# Altium PCB FFD.PcbDoc
Units mm, origin at the board's own origin, x right, y up, seen from the top; angles counter-clockwise.
Board outline 50 x 50 mm, 2 copper layers (Top Layer, Bottom Layer); 7 components, 11 nets, 38 pads, 6 vias.
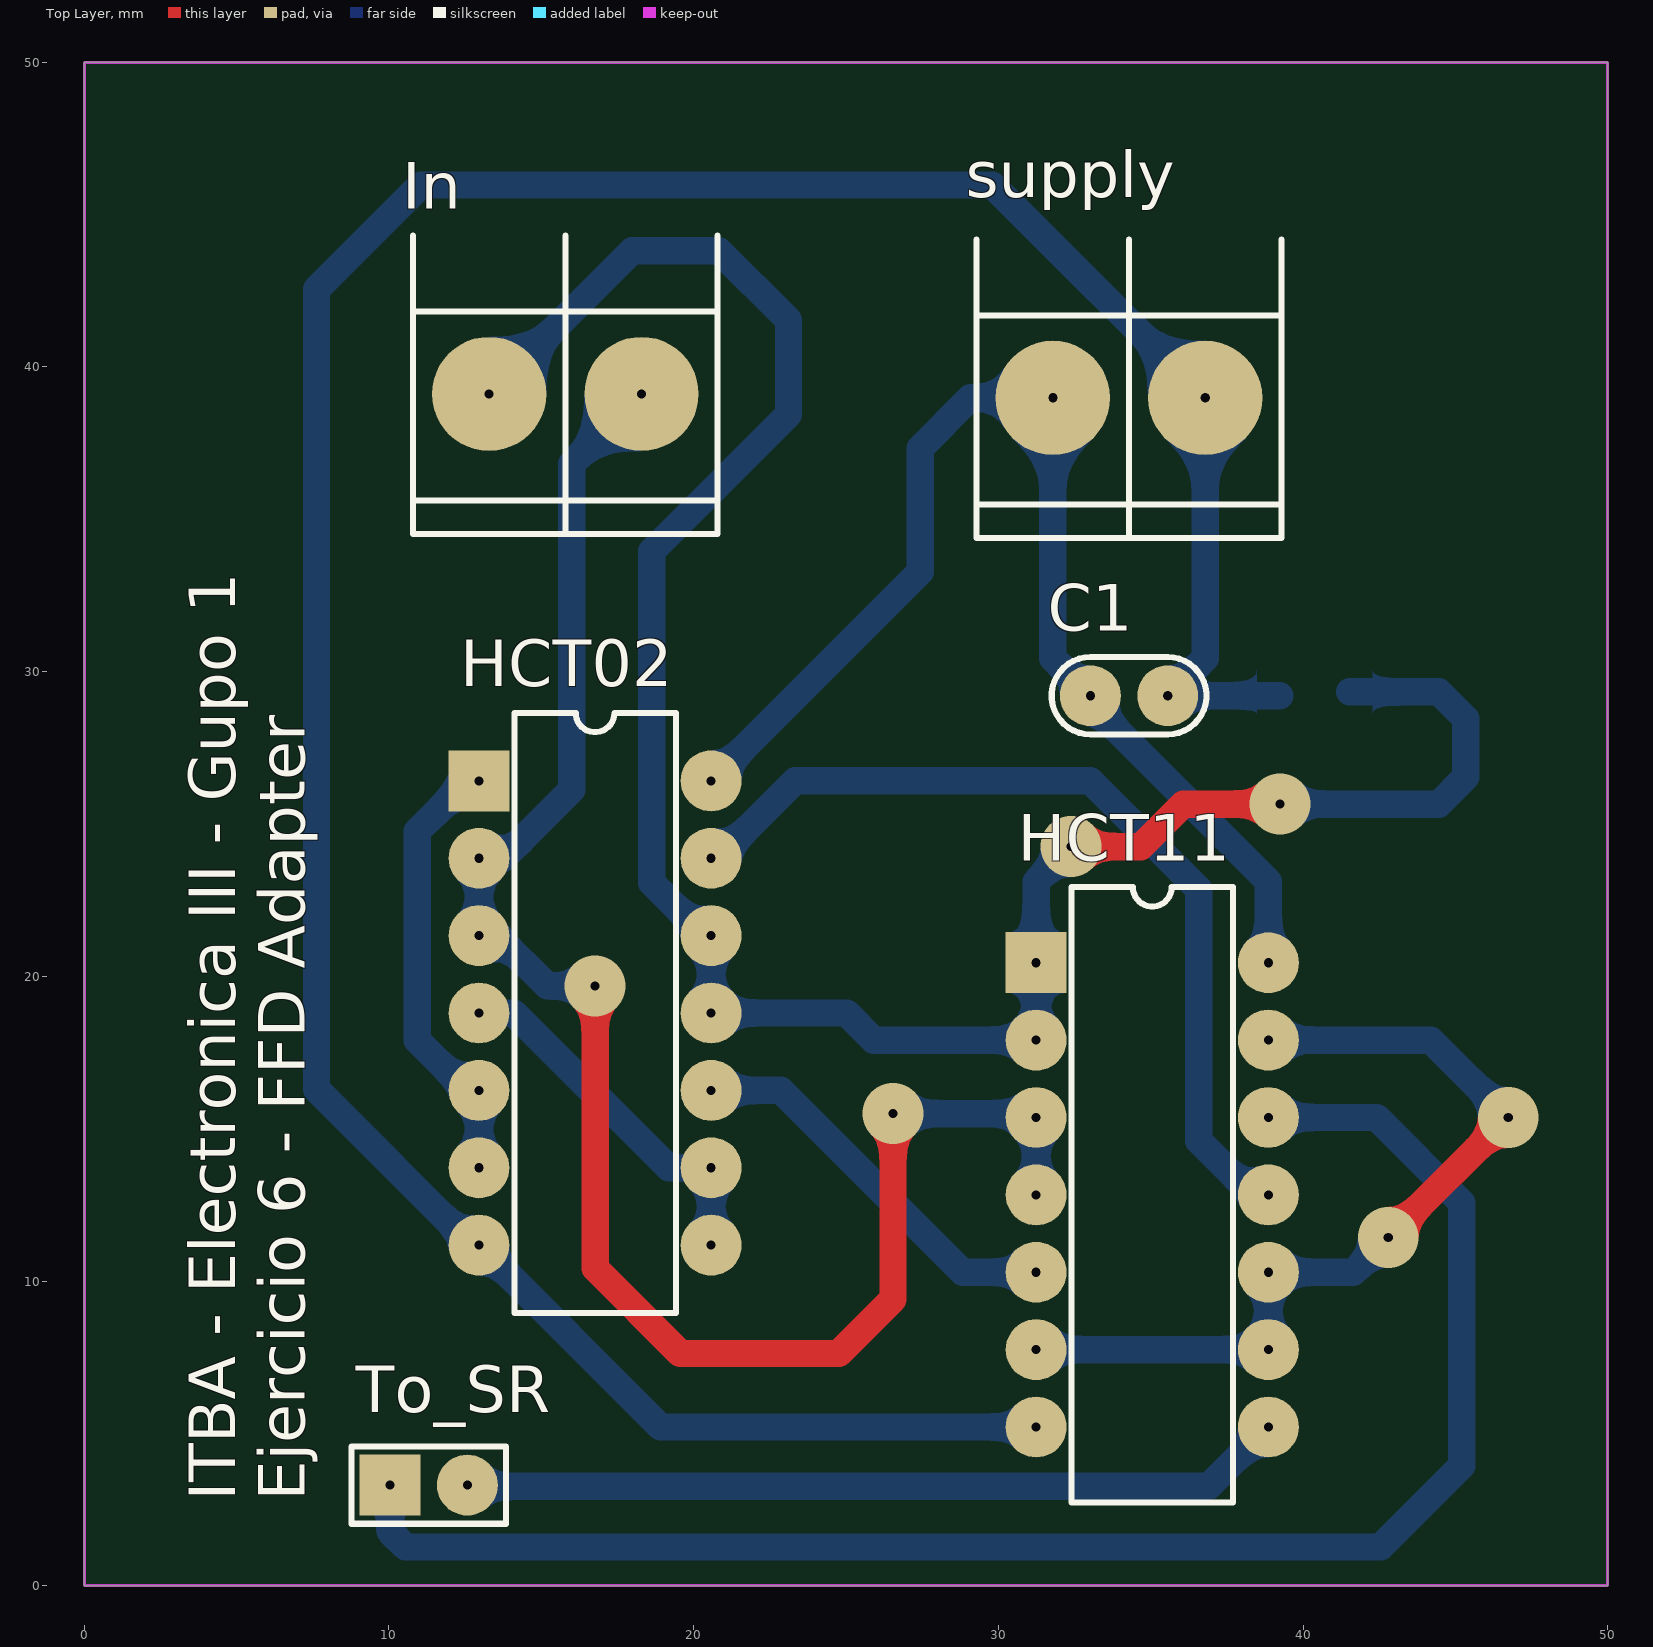
[diagram p0: Top Layer view]
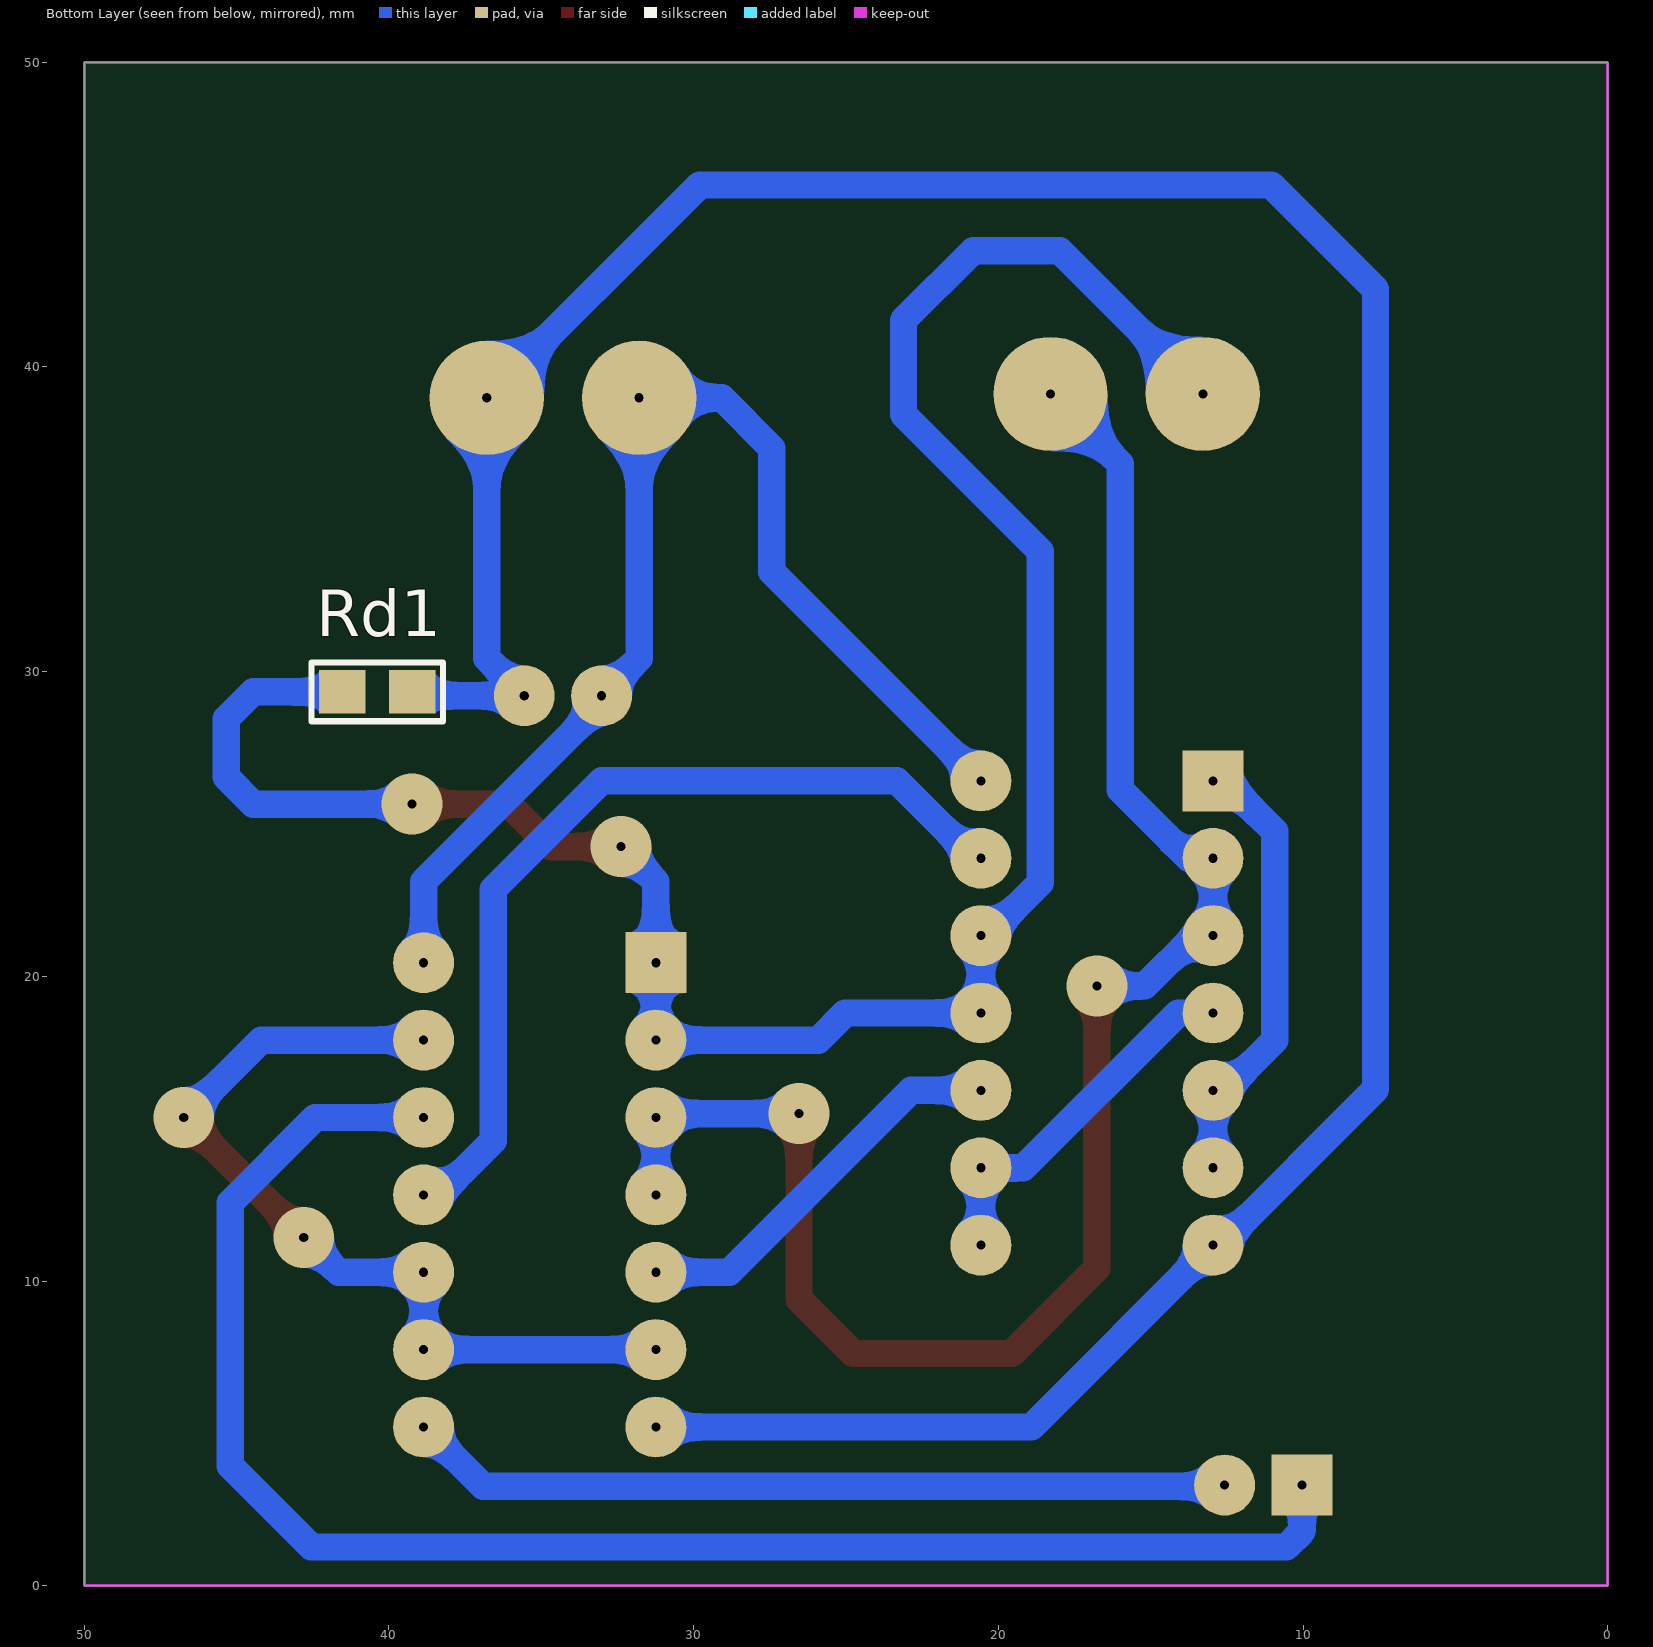
[diagram p1: Bottom Layer view, seen from below]
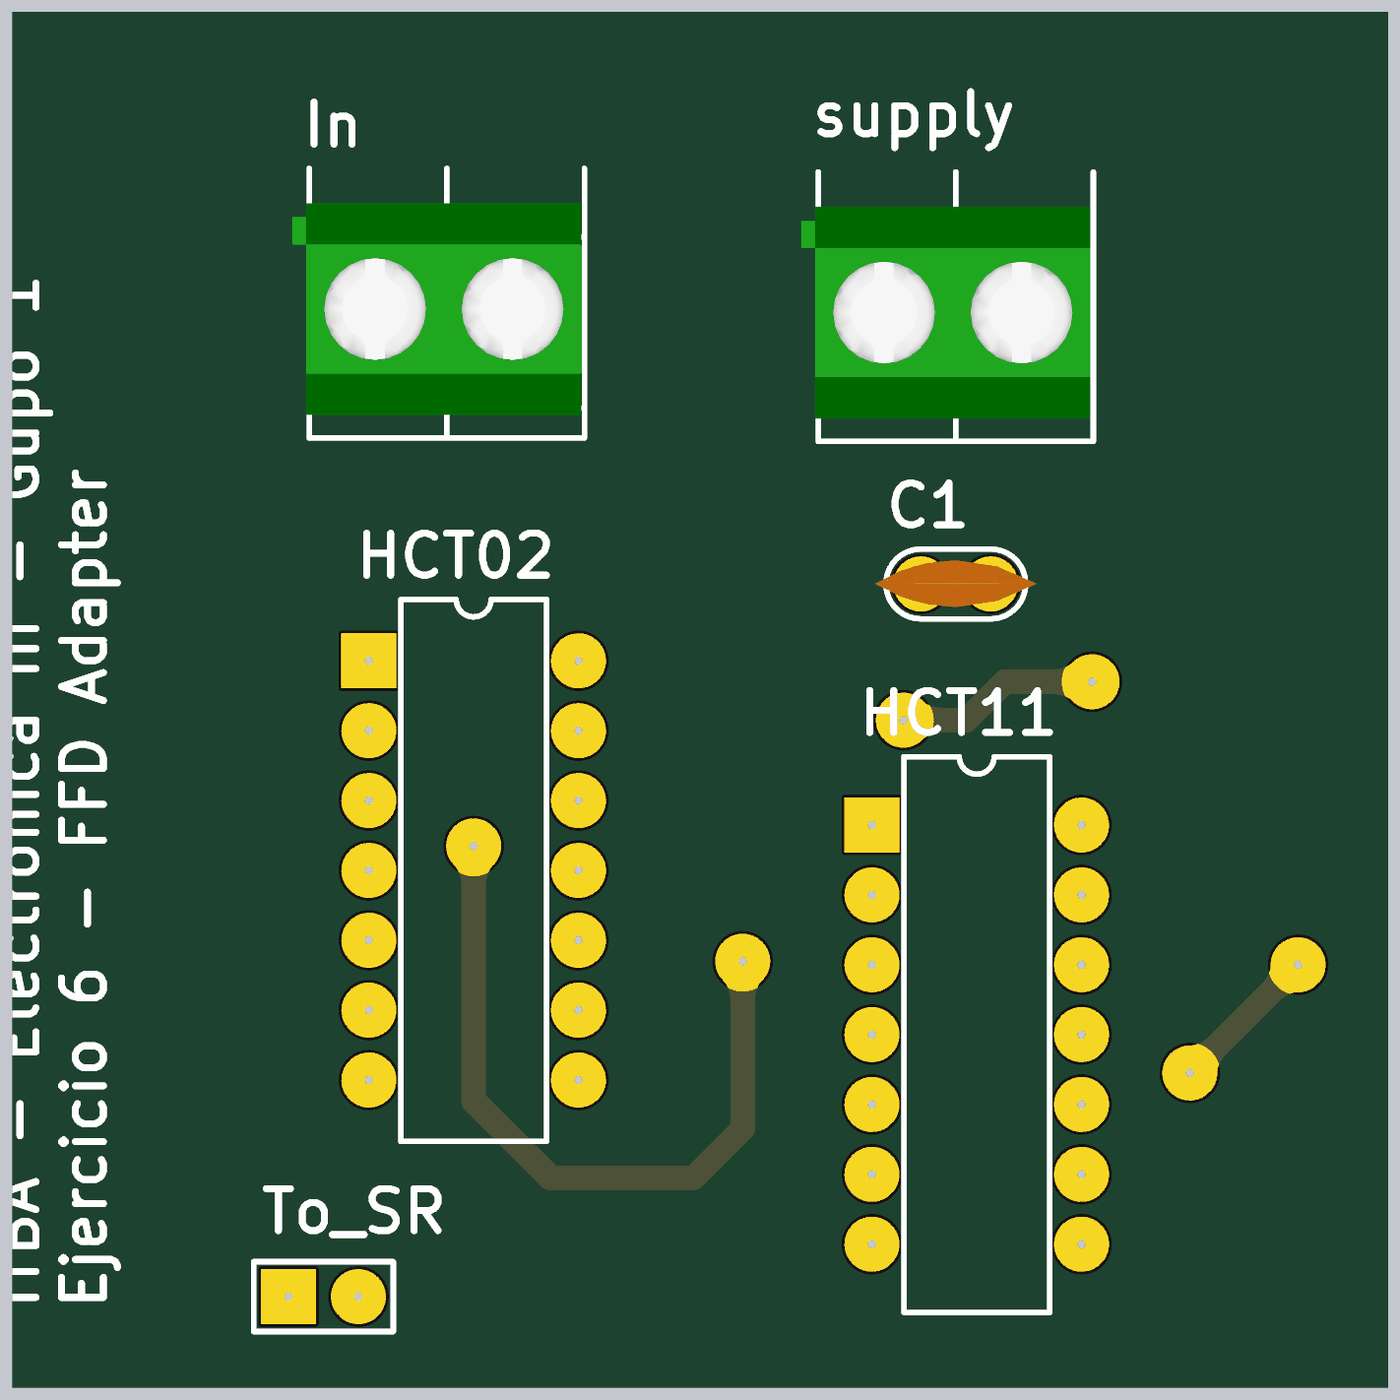
[diagram p2: 3D render of the assembled board from above, using the file's embedded part models]

## Layer stack, top to bottom
Top Solder: solder mask 0.0102, Solder Resist, Dk 3.5
Top Layer: signal copper 0.0356
Dielectric 1: dielectric 0.32, FR-4, Dk 4.8
Bottom Layer: signal copper 0.0356
Bottom Solder: solder mask 0.0102, Solder Resist, Dk 3.5

## Board outline
0,0 50,0 50,50 0,50

## Design rules (kind name [scope] priority, off if disabled: settings)
Clearance [All] p1: gap=0.5 ignorepadtopadclearanceinfootprint=FALSE
PolygonConnect [All] p1: connectstyle=Relief reliefconductorwidth=0.254 reliefentries=4 polygonreliefangle="90 Angle" airgapwidth=0.254
RoutingVias [All] p1: holewidth=0.3 width=2 viastyle="Through Hole" minholewidth=0.3 minwidth=2 maxholewidth=0.5 maxwidth=2
SolderMaskExpansion [All] p1: expansion=0.102
Width [All] p1: maxlimit=0.9 minlimit=0.6 preferedwidth=0.9
30 further rules are at their usual default settings.

## Components (designator, comment, footprint, x,y, rotation, side; value= is the part's Value field where it differs from the comment)
C1 "CAP" CAP100 34.29,29.21 r0 top
HCT02 "SN74HC02N" N014 16.764,18.796 r270 top
HCT11 "SN54HC11J" J014 35.052,12.827 r270 top
In "BORNERA 2" BORNERA2 15.788,39.116 r90 top
Rd1 "RES" 0805 40.386,29.337 r0 bottom
supply "BORNERA 2" BORNERA2 34.29,38.989 r90 top
To_SR "Header 2" HDR1X2 10.033,3.302 r0 top

## Footprints (in the part's own frame and the unit in brackets; to place one, negate y for a bottom-side part, rotate by r counter-clockwise, add the part's x,y. Pads: shape width x height; smd on the part's side, far side on the other; paste and mask are expansions set on the pad)
0805 [mil] "Pasivo 0805"
  rect 60x56 smd: 1(-45,0) 2(45,0)
  silkscreen extent -85,-38 85,38, body extent -39,-25 39,25, height 15
BORNERA2 [mm] "Bornera con Tornillos 5mm separación"
  round 3.75 hole 0.3: 1(0,2.5) 2(0,-2.5)
  silkscreen extent -4.6,-5 5.2,5, body extent -3.76,-4.89 3.94,5.61, height 10
CAP100 [mm]
  round 2 hole 0.3: 1(-1.27,0) 2(1.27,0)
  silkscreen extent -2.54,-1.27 2.54,1.27, body extent -2.92,-0.84 2.92,0.86, height 6.12
HDR1X2 [mm] "Connector; Header; 2 Position"
  rect 2x2 hole 0.3: 1(0,0)
  round 2 hole 0.3: 2(2.54,0)
  silkscreen extent -1.27,-1.27 3.81,1.27
J014 [mm] "DIP; 14 Leads; Row Spacing 7.62 mm; Pitch 2.54 mm"
  rect 2x2 hole 0.3: 1(-7.62,-3.81)
  round 2 hole 0.3: 2(-5.08,-3.81) 3(-2.54,-3.81) 4(0,-3.81) 5(2.54,-3.81) 6(5.08,-3.81) 7(7.62,-3.81) 8(7.62,3.81) 9(5.08,3.81) 10(2.54,3.81) 11(0,3.81) 12(-2.54,3.81) 13(-5.08,3.81) 14(-7.62,3.81)
  silkscreen extent -10.1,-2.65 10.1,2.65
N014 [mm] "DIP; 14 Leads; Row Spacing 7.62 mm; Pitch 2.54 mm"
  rect 2x2 hole 0.3: 1(-7.62,-3.81)
  round 2 hole 0.3: 2(-5.08,-3.81) 3(-2.54,-3.81) 4(0,-3.81) 5(2.54,-3.81) 6(5.08,-3.81) 7(7.62,-3.81) 8(7.62,3.81) 9(5.08,3.81) 10(2.54,3.81) 11(0,3.81) 12(-2.54,3.81) 13(-5.08,3.81) 14(-7.62,3.81)
  silkscreen extent -9.85,-2.65 9.85,2.65

## Part data
HCT02: "Quadruple 2-Input Positive-NOR Gate", ComponentLink1Description="Manufacturer Link", ComponentLink1URL=http://www.ti.com/, ComponentLink2Description=Datasheet, ComponentLink2URL=http://www-s.ti.com/sc/ds/sn74hc02.pdf, DatasheetVersion=May-1997, LatestRevisionDate=04-Mar-2005, LatestRevisionNote="Stylized 3D Model Added.", PackageDescription="DIP; 14 Leads; Row Spacing 7.62 mm; Pitch 2.54 mm", PackageReference=N014, PackageVersion=Oct-1995, Published=8-Jun-2000, Publisher="Altium Limited"
HCT11: "Triple 3-Input Positive-AND Gate", ComponentLink1Description="Manufacturer Link", ComponentLink1URL=http://www.ti.com/, ComponentLink2Description=Datasheet, ComponentLink2URL=http://www-s.ti.com/sc/ds/sn54hc11.pdf, ComponentLink3Description="Packaging Specification", ComponentLink3URL=http://focus.ti.com/lit/ml/mcer002d/mcer002d.pdf, DatasheetVersion=May-1997, LatestRevisionDate=04-Mar-2005, LatestRevisionNote="Stylized 3D Model Added.", PackageDescription="DIP; 14 Leads; Row Spacing 7.62 mm; Pitch 2.54 mm", PackageReference=J014, PackageVersion=Jun-1999, Published=8-Jun-2000, Publisher="Altium Limited"
To_SR: "Header, 2-Pin", LatestRevisionDate=17-Jul-2002, LatestRevisionNote="Re-released for DXP Platform.", Publisher="Altium Limited"

## Via types
v1: diameter 2, hole 0.3, Top Layer to Bottom Layer, 6 vias

## Nets (pads, with @x,y where several pads share a name; then routed paths per layer and width w, separated by ;. In a path a pad name is that pad's centre, name@x,y a point inside that pad or via, vN(x,y) a via of type N, cw(c..) or ccw(c..) an arc to the next point about the centre after c; other vN are vias at no path point)
CLK: HCT02.2 HCT02.3 HCT11.3 HCT11.4 In.2 | length 59.3
  Top Layer w0.9: v1(16.764,19.685) 16.764,10.414 19.558,7.62 24.765,7.62 26.543,9.398 v1(26.543,15.494)
  Bottom Layer w0.9: v1(16.764,19.685) 15.188,19.685 13.537,21.336 HCT02.3 HCT02.2 13.758,23.876 16.002,26.12 16.002,36.83 In.2 ; v1(26.543,15.494) 31.115,15.494 HCT11.3 HCT11.4
D: HCT02.11 HCT02.12 HCT11.1 HCT11.2 In.1 Rd1.2 | length 76.1
  Top Layer w0.9: v1(32.385,24.257) 34.671,24.257 36.068,25.654 v1(39.243,25.654)
  Bottom Layer w0.9: In.1 17.987,43.815 20.828,43.815 23.114,41.529 23.114,38.444 18.624,33.954 18.624,23.068 20.356,21.336 HCT02.12 HCT02.11 25.019,18.796 25.908,17.907 HCT11.2 HCT11.1 31.242,23.114 v1(32.385,24.257) ; v1(39.243,25.654) 44.45,25.654 45.339,26.543 45.339,28.448 44.45,29.337 Rd1.2
GND: C1.2 HCT02.7 HCT11.7 Rd1.1 supply.2 | length 101.9
  Bottom Layer w0.9: HCT11.7 18.923,5.207 HCT02.7 12.736,11.176 7.62,16.292 7.62,42.545 11.049,45.974 29.805,45.974 supply.2 36.79,30.44 C1.2 Rd1.1@39.243,29.21
NetHCT02_1: HCT02.1 HCT02.5 HCT02.6 | length 14.8
  Bottom Layer w0.9: HCT02.6 HCT02.5 12.573,16.256 10.922,17.907 10.922,24.765 12.573,26.416 HCT02.1
NetHCT02_4: HCT02.4 HCT02.8 HCT02.9 | length 12.3
  Bottom Layer w0.9: HCT02.4 14.097,18.796 19.177,13.716 HCT02.9 HCT02.8
NetHCT02_10: HCT02.10 HCT11.5 | length 13.1
  Bottom Layer w0.9: HCT02.10 22.86,16.256 28.829,10.287 HCT11.5
NetHCT02_13: HCT02.13 HCT11.11 | length 29.8
  Bottom Layer w0.9: HCT02.13 20.792,23.876 23.332,26.416 33.02,26.416 36.576,22.86 36.576,14.605 38.354,12.827 HCT11.11
NetHCT11_6: HCT11.6 HCT11.9 HCT11.10 HCT11.13 | length 29.1
  Top Layer w0.9: v1(42.799,11.43) v1(46.736,15.367)
  Bottom Layer w0.9: HCT11.6 HCT11.9 HCT11.10 41.656,10.287 v1(42.799,11.43) ; HCT11.13 44.196,17.907 v1(46.736,15.367)
Reset: HCT11.8 To_SR.2 | length 27.1
  Bottom Layer w0.9: To_SR.2 12.573,3.257 36.912,3.257 HCT11.8
Set: HCT11.12 To_SR.1 | length 54.2
  Bottom Layer w0.9: To_SR.1 10.033,1.778 10.541,1.27 42.545,1.27 45.212,3.937 45.212,12.573 42.418,15.367 HCT11.12
VCC: C1.1 HCT02.14 HCT11.14 supply.1 | length 40.3
  Bottom Layer w0.9: HCT02.14 27.432,33.274 27.432,37.338 29.083,38.989 supply.1 31.79,30.44 C1.1 33.02,28.956 38.862,23.114 HCT11.14

## Keep-outs
Keep-Out Layer:
  the board outline again, w0.1

## Silkscreen, mask and mechanical layers (free items; w line width, h text height)
Top Overlay:
  text "ITBA - Electronica III - Gupo 1 / Ejercicio 6 - FFD Adapter" at 7.239,2.794 h1.52 r90